# Altium PCB Master_Board_v1_110116.PcbDoc
Units mil, origin at the board's own origin, x right, y up, seen from the top; angles counter-clockwise.
Board outline 2559.06 x 1968.5 mil, 2 copper layers (Top Layer, Bottom Layer); 33 components, 36 nets, 213 pads, 37 vias.
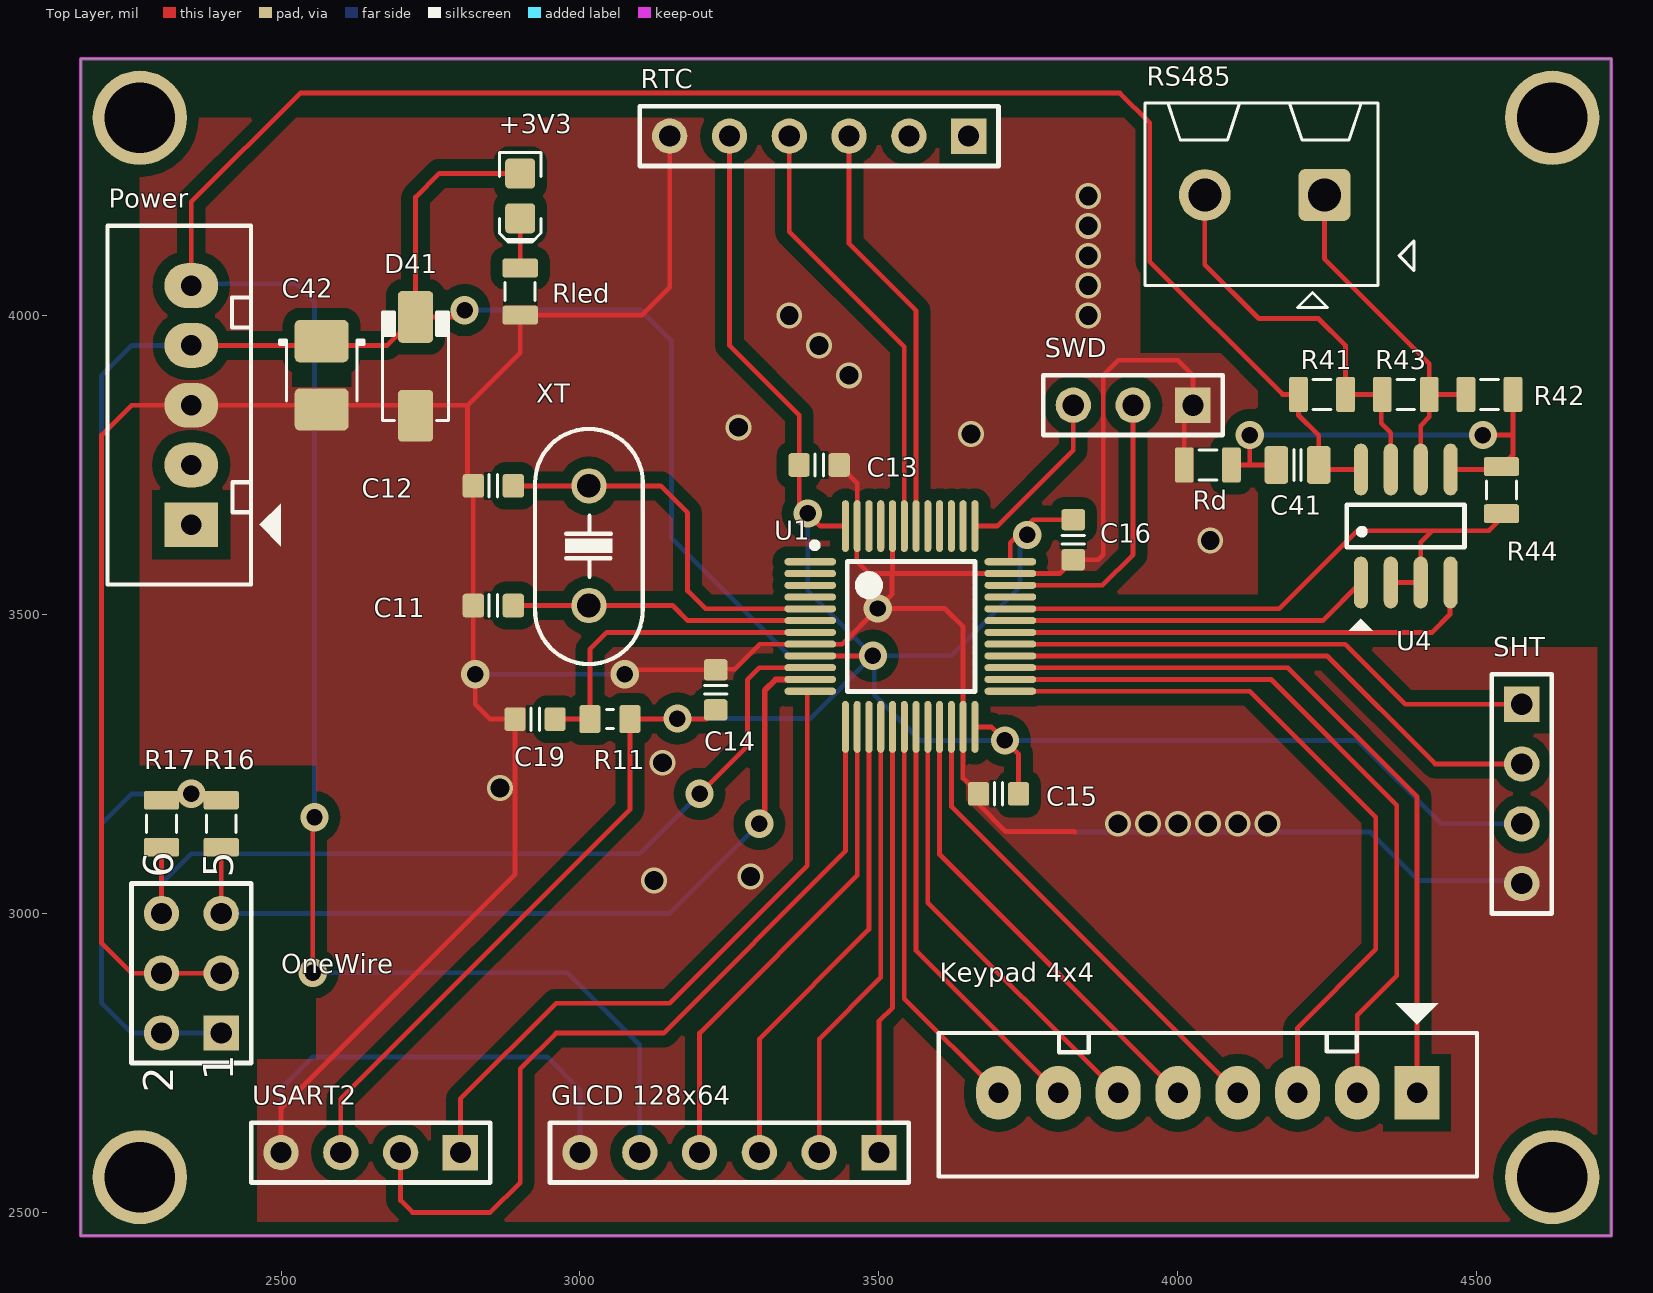
[diagram p0: Top Layer view]
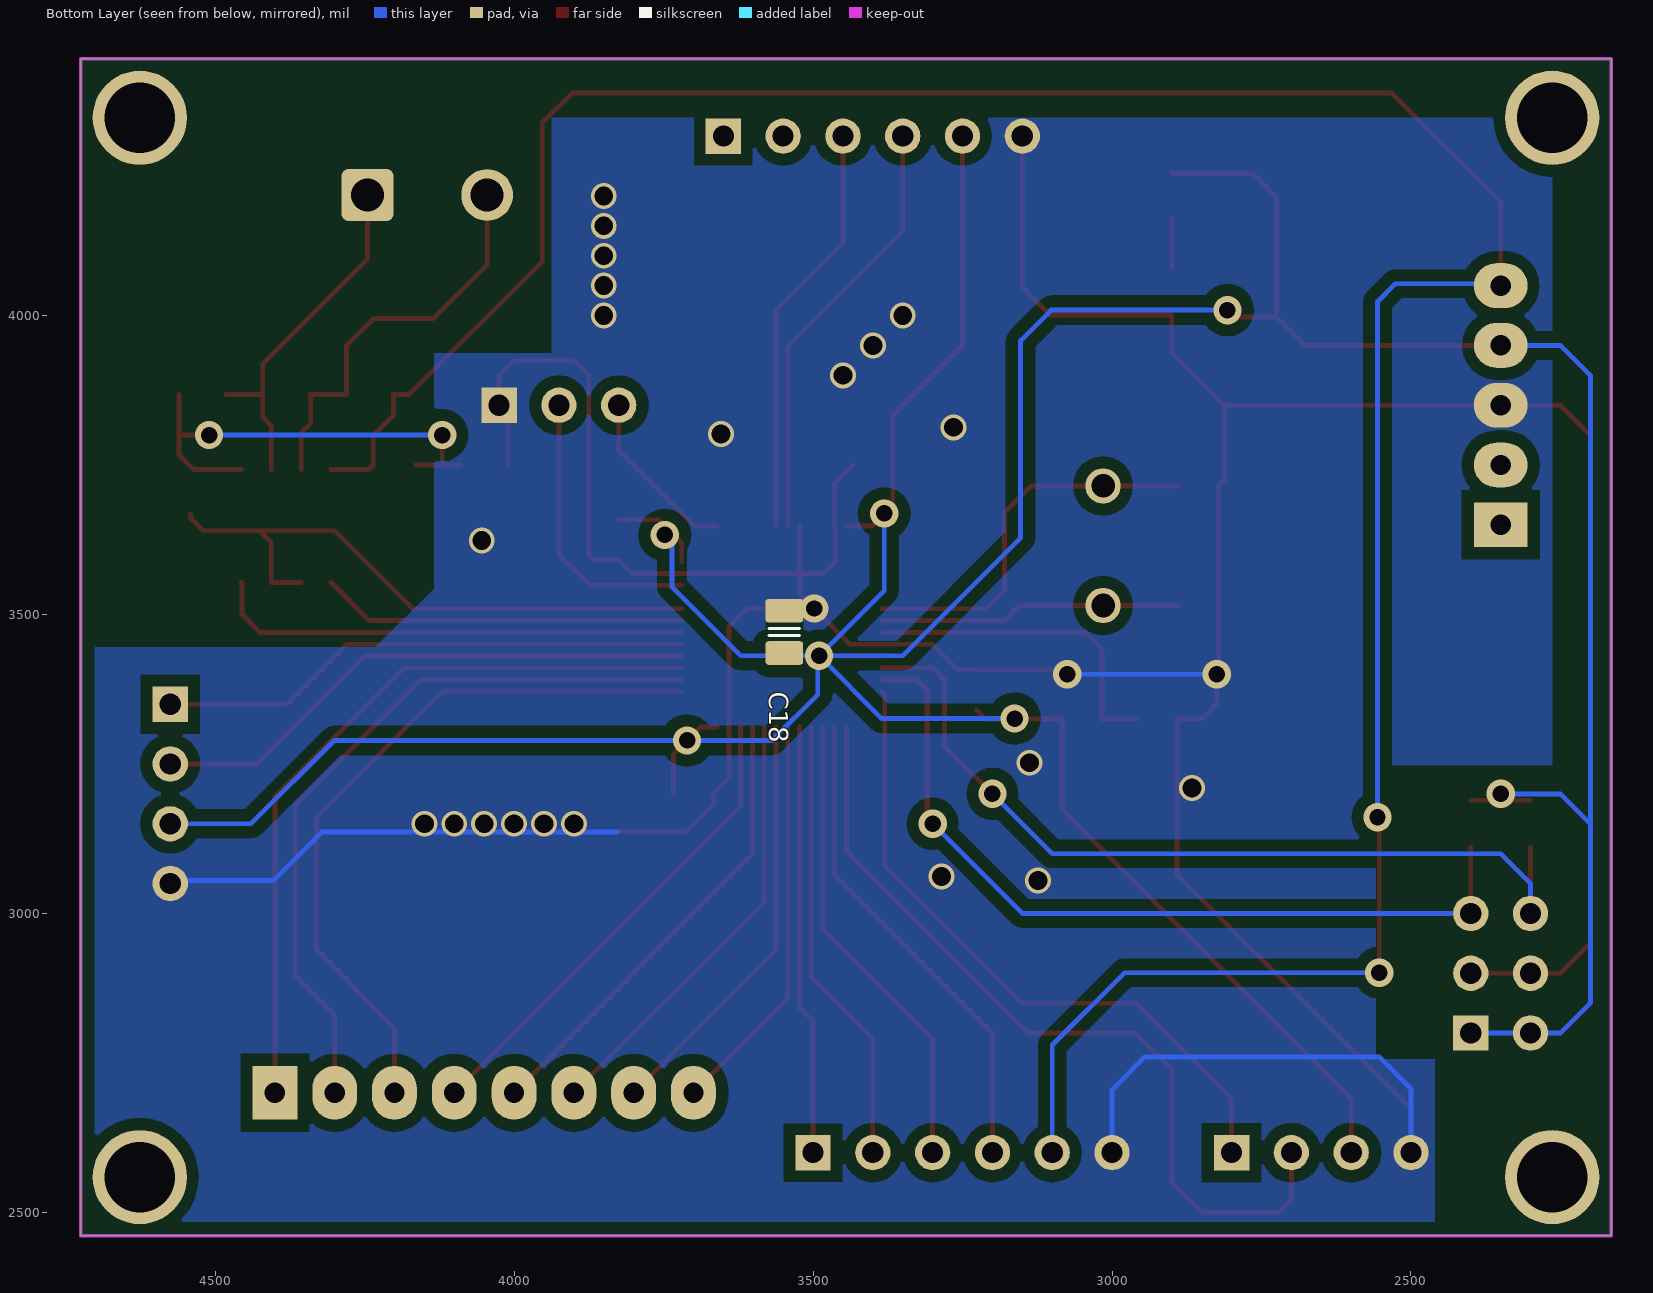
[diagram p1: Bottom Layer view, seen from below]

## Layer stack, top to bottom
Top Solder: solder mask 0.4, Solder Resist, Dk 3.5
Top Layer: signal copper 1.4
Dielectric 1: dielectric 12.6, FR-4, Dk 4.8
Bottom Layer: signal copper 1.4
Bottom Solder: solder mask 0.4, Solder Resist, Dk 3.5

## Board outline
2165.35,2460.63 4724.41,2460.63 4724.41,4429.13 2165.35,4429.13

## Design rules (kind name [scope] priority, off if disabled: settings)
Clearance [All] p1: gap=20
PlaneConnect [All] p1: planeconnectstyle=Direct reliefexpansion=20 reliefentries=4 reliefconductorwidth=10 reliefairgap=10
PolygonConnect [All] p1: connectstyle=Direct reliefconductorwidth=10 reliefentries=4 polygonreliefangle="90 Angle" airgapwidth=10
RoutingVias [All] p1: holewidth=28 width=50 viastyle="Through Hole" minholewidth=23.62 minwidth=43.31 maxholewidth=196.85 maxwidth=196.85
SolderMaskExpansion [All] p1: expansion=4
Width [All] p1: maxlimit=196.85 minlimit=8 preferedwidth=10
29 further rules are at their usual default settings.

## Components (designator, comment, footprint, x,y, rotation, side; value= is the part's Value field where it differs from the comment)
+3V3 "Blue" LED-0805-K 2900,4200 r270 top
C11 "Cap_22p_0603" CAPC1608N 2855,3515 r180 top
C12 "Cap_22p_0603" CAPC1608N 2855,3715 r180 top
C13 "Cap_104_0603" CAPC1608N 3400,3750 r180 top
C14 "Cap_104_0603" CAPC1608N 3227,3374 r270 top
C15 "Cap_104_0603" CAPC1608N 3700,3200 r0 top
C16 "Cap_104_0603" CAPC1608N 3825,3625 r90 top
C18 "Cap_10uF_0805" CAPC2012N_F#1 3548,3471 r270 bottom
C19 "Cap_104_0603" CAPC1608N 2925,3325 r0 top
C41 "100nF/104" CAPC2012N_F#2 4200,3750 r0 top
C42 "330uF/25V" CAPMP3528X210N 2568,3900 r270 top
D41 "Diode" DO-214AC 2725,3915 r90 top
"GLCD 128x64" "Header 6" HDR1X6 3500,2600 r180 top
"Keypad 4x4" "JP8" CON8 4400,2700 r180 top
OneWire "Header 3X2" HDR2X3 2400,2800 r90 top
Power "JP5" CON5 2350,3650 r90 top
R11 "Res_10k_0603" RESC1608N_F 3050,3325 r0 top
R16 "Res" RESC2012N_F 2400,3150 r90 top
R17 "Res" RESC2012N_F 2300,3150 r90 top
R41 "1k" RESC2012N_F 4241,3868 r180 top
R42 "1k" RESC2012N_F 4521,3868 r180 top
R43 "330R" RESC2012N_F 4381,3868 r180 top
R44 "330R" RESC2012N_F 4541,3708 r270 top
Rd "Res" RESC2012N_F 4050,3750 r180 top
Rled "Res_0805_1k" RESC2012N_F 2900,4040 r270 top
RS485 "Stackable ScrewTerm" 2P_PCB1 4300,4050 r90 top
RTC "Header 6" HDR1X6 3650,4300 r180 top
SHT "Header 4" HDR1X4 4575,3350 r270 top
SWD "Header 3" HDR1X3 4025,3850 r180 top
U1 "STM32F103C8T6" LQFT48N 3325,3250 r0 top
U4 "MAX485" SO-8 4381,3648 r90 top
USART2 "Header 4" HDR1X4 2800,2600 r180 top
XT "8MHz" XT2 3015,3615 r90 top

## Footprints (in the part's own frame and the unit in brackets; to place one, negate y for a bottom-side part, rotate by r counter-clockwise, add the part's x,y. Pads: shape width x height; smd on the part's side, far side on the other; paste and mask are expansions set on the pad)
2P_PCB1 [mm]
  rrect25% 2.2x2.2 hole 1.4: 1(3.85,1.397)
  round 2.2 hole 1.4: 2(3.85,6.477)
  silkscreen extent -0.93,-2.41 7.75,9.02, body extent 0.14,-1.54 7.74,9.06, height 10.01
CAPC1608N [mm] "Chip Capacitor, Body 1.6x0.8mm, 0603, IPC Medium Density"
  round 0.254 on Mech14: 0(0,0)
  rrect25% 0.9x1 smd: 1(-0.85,0) 2(0.85,0)
  Top Layer pour cut-out: -0.4,0.6 0.4,0.6 0.4,-0.6 -0.4,-0.6
  silkscreen extent -0.18,-0.48 0.18,0.48, body extent -0.85,-0.45 0.85,0.45, height 0.89
CAPC2012N_F#1 [mm] "Chip Capacitor, Body 2.0x1.2mm, 0805, IPC Medium Density, for Flex circuits"
  round 0.254 on Mech14: 0(0,0)
  rrect25% 1.2x1.4 on Bottom Solder: 1(-0.9,0) 1(0.9,0)
  rrect25% 1x1.6 smd paste-1: 1(-0.9,0) 2(0.9,0)
  rrect25% 1x1.4 on Bottom Paste: 1(-0.9,0) 1(0.9,0)
  Top Layer pour cut-out: -0.4,0.8 0.4,0.8 0.4,-0.8 -0.4,-0.8
  silkscreen extent -0.15,-0.65 0.15,0.65, body extent -1.1,-0.72 1.1,0.73, height 1.34
CAPC2012N_F#2 [mm] "Chip Capacitor, Body 2.0x1.2mm, 0805, IPC Medium Density, for Flex circuits"
  round 0.254 on Mech14: 0(0,0)
  rrect25% 1.2x1.4 on Top Solder: 1(-0.9,0) 1(0.9,0)
  rrect25% 1x1.6 smd paste-1: 1(-0.9,0) 2(0.9,0)
  rrect25% 1x1.4 on Top Paste: 1(-0.9,0) 1(0.9,0)
  Top Layer pour cut-out: -0.4,0.8 0.4,0.8 0.4,-0.8 -0.4,-0.8
  silkscreen extent -0.15,-0.65 0.15,0.65, body extent -1.1,-0.72 1.1,0.73, height 1.34
CAPMP3528X210N [mm] "Molded body capacitor, Body 3.5x2.8mm, 1210, IPC Nominal settings"
  round 0.254 on Mech14: 0(0,0)
  rrect25% 1.8x2.3 smd: 1(-1.45,0) 2(1.45,0)
  Top Layer pour cut-out: -0.508,1.27 0.508,1.27 0.508,-1.27 -0.508,-1.27
  silkscreen extent -1.5,-1.8 1.1,1.8, body extent -1.75,-1.4 1.75,1.4, height 2.1
CON5 [mil] "CON5"
  rect 75x90 hole 34: 1(0,0)
  oval 75x90 hole 34: 2(100,0) 3(200,0) 4(300,0) 5(400,0)
  silkscreen extent -100,-150 500,140
CON8 [mil] "CON8"
  rect 75x90 hole 34: 1(0,0)
  oval 75x90 hole 34: 2(100,0) 3(200,0) 4(300,0) 5(400,0) 6(500,0) 7(600,0) 8(700,0)
  silkscreen extent -100,-150 800,140
DO-214AC [mm] "JEDEC DO214 variation AC. SMA"
  round 0.508 on Mech14: 0(0,0)
  rrect25% 2.2x1.5 smd: A(-2.1,0) K(2.1,0)
  silkscreen extent -2.3,-1.4 2.3,1.4, body extent -2.6,-1.3 2.6,1.3, height 2.42
HDR1X3 [mm] "Connector; Header; 3 Position"
  rect 1.5x1.5 hole 0.9: 1(0,0)
  round 1.5 hole 0.9: 2(2.54,0) 3(5.08,0)
  silkscreen extent -1.27,-1.27 6.35,1.27, body extent -1.27,-1.27 6.35,1.27, height 7
HDR1X4 [mm] "Connector; Header; 4 Position"
  rect 1.5x1.5 hole 0.9: 1(0,0)
  round 1.5 hole 0.9: 2(2.54,0) 3(5.08,0) 4(7.62,0)
  silkscreen extent -1.27,-1.27 8.89,1.27, body extent -1.27,-1.27 8.89,1.27, height 7
HDR1X6 [mm] "Connector; Header; 6 Position"
  rect 1.5x1.5 hole 0.9: 1(0,0)
  round 1.5 hole 0.9: 2(2.54,0) 3(5.08,0) 4(7.62,0) 5(10.16,0) 6(12.7,0)
  silkscreen extent -1.27,-1.27 13.97,1.27, body extent -1.27,-1.3 13.97,1.24, height 8.55
HDR2X3 [mm] "Connector; Header; 3x2 Position"
  rect 1.5x1.5 hole 0.9: 1(0,0)
  round 1.5 hole 0.9: 2(0,2.54) 3(2.54,0) 4(2.54,2.54) 5(5.08,0) 6(5.08,2.54)
  silkscreen extent -1.27,-1.27 6.35,3.81, body extent -1.27,-1.27 6.35,3.81, height 7
LED-0805-K [mil]
  round 20 on Mech14: 0(0,0)
  rrect25% 50x50 smd: A(-37.5,0) K(37.5,0)
  Top Layer pour cut-out: -15,30 15,30 15,-30 -15,-30
  silkscreen extent -72,-35 77,35, body extent -39,-25 39,25, height 31
LQFT48N [mm] "Thin QFP, 48-Leads, Body 7x7mm, Pitch 0.5mm"
  oval 2.2x0.3 smd: 1(1.525,8.59) 2(1.525,8.09) 3(1.525,7.59) 4(1.525,7.09) 5(1.525,6.59) 6(1.525,6.09) 7(1.525,5.59) 8(1.525,5.09) 9(1.525,4.59) 10(1.525,4.09) 11(1.525,3.59) 12(1.525,3.09) 25(10.025,3.09) 26(10.025,3.59) 27(10.025,4.09) 28(10.025,4.59) 29(10.025,5.09) 30(10.025,5.59) 31(10.025,6.09) 32(10.025,6.59) 33(10.025,7.09) 34(10.025,7.59) 35(10.025,8.09) 36(10.025,8.59)
  oval 0.3x2.2 smd: 13(3.021,1.575) 14(3.521,1.575) 15(4.021,1.575) 16(4.521,1.575) 17(5.021,1.575) 18(5.521,1.575) 19(6.021,1.575) 20(6.521,1.575) 21(7.021,1.575) 22(7.521,1.575) 23(8.021,1.575) 24(8.521,1.575) 37(8.521,10.105) 38(8.021,10.105) 39(7.521,10.105) 40(7.021,10.105) 41(6.521,10.105) 42(6.021,10.105) 43(5.521,10.105) 44(5.021,10.105) 45(4.521,10.105) 46(4.021,10.105) 47(3.521,10.105) 48(3.021,10.105)
  silkscreen extent 1.6,3.08 8.52,9.41, body extent 1.27,1.35 10.27,10.35, height 1.5
RESC1608N_F [mm] "Chip Resistor, Body 1.6x0.8mm, 0603, IPC Medium Density, for Flex circuits"
  round 0.254 on Mech14: 0(0,0)
  rrect25% 1.1x1 on Top Solder: 1(-0.85,0) 1(0.85,0)
  rrect25% 0.9x1.2 smd paste-1: 1(-0.85,0) 2(0.85,0)
  rrect25% 0.9x1 on Top Paste: 1(-0.85,0) 1(0.85,0)
  Top Layer pour cut-out: -0.4,0.6 0.4,0.6 0.4,-0.6 -0.4,-0.6
  silkscreen extent -0.15,-0.41 0.15,0.41, body extent -0.87,-0.47 0.88,0.48, height 0.54
RESC2012N_F [mm] "Chip Resistor, Body 2.0x1.2mm, 0805, IPC Medium Density"
  round 0.254 on Mech14: 0(0,0)
  rrect25% 1x1.3 on Top Solder: 1(-1,0) 1(1,0)
  rrect25% 0.8x1.5 smd paste-1: 1(-1,0) 2(1,0)
  rrect25% 0.8x1.3 on Top Paste: 1(-1,0) 1(1,0)
  Top Layer pour cut-out: -0.6,0.75 0.6,0.75 0.6,-0.75 -0.6,-0.75
  silkscreen extent -0.38,-0.64 0.38,0.64, body extent -1.1,-0.67 1.1,0.68, height 0.69
SO-8 [mm] "8-Pin Small Outline Integrated Circuit 1.27 mm Pitch, IPC Medium Density"
  oval 2.2x0.6 smd: 1(-2.4,1.905) 2(-2.4,0.635) 3(-2.4,-0.635) 4(-2.4,-1.905) 5(2.4,-1.905) 6(2.4,-0.635) 7(2.4,0.635) 8(2.4,1.905)
  silkscreen extent -4.44,-2.5 0.9,2.5, body extent -1.95,-2.45 1.95,2.45, height 1.75
XT2 [mm]
  round 1.5 hole 1: 1(-2.54,0) 2(2.54,0)
  silkscreen extent -5.03,-2.29 4.96,2.29, body extent -5.93,-2.36 5.42,2.29, height 3.5

## Part data
+3V3: library part LED_SMD_Blue_0805_100mcd, "LED 0805 SMD Blue 100mcd 470nm"
C11 C12 C13 C14 C15 C16 C18 C19 C41: library part "CAP NP"
C42: library part CP4, "Cap 1000uF/16V - 220uF/50V"
"GLCD 128x64" RTC: "Header, 6-Pin"
"Keypad 4x4": library part Con8, "Connector 8"
OneWire: "Header, 3-Pin, Dual row"
Power: library part Con5, "Connector 5"
R11 Rled: library part Res
R41 R42 R43 R44: library part Res, "Tro dan"
RS485: library part 2P_ScrewTerm_90S_3.81MM, "Terminal Block Screw Type THT 2-Position 3.81mm pitch"
SHT USART2: "Header, 4-Pin"
SWD: "Header, 3-Pin"
U1: "ARM Cortex-M3 32-bit MCU, 64 KB Flash, 20 KB Internal RAM, 37 I/Os, 48-pin LQFP, -40 to 85 degC, Tray"
U4: "RS232 - RS485 (Same sn75176)"
XT: library part Crystal

## Free pads (board coordinates)
  round 157.48 hole 118.11: 2(4625.98,4330.71) 3(4625.98,2559.06) 4(2263.78,2559.06) 5(2263.78,4330.71)

## Via types
v1: diameter 43.31, hole 31.5, Top Layer to Bottom Layer, 21 vias
v2: diameter 47.24, hole 27.56, Top Layer to Bottom Layer, 16 vias

## Nets (pads, with @x,y where several pads share a name; then routed paths per layer and width w, separated by ;. In a path a pad name is that pad's centre, name@x,y a point inside that pad or via, vN(x,y) a via of type N, cw(c..) or ccw(c..) an arc to the next point about the centre after c; other vN are vias at no path point)
+3V3: +3V3.A C13.2 C14.2 C15.2 C16.2 C18.2 C42.1 D41.K OneWire.1 OneWire.2 Power.4 R11.2 R16.2 R17.2 RTC.5 SHT.3 U1.9 U1.24 U1.36 U1.48 USART2.3 | length 8248.2
  Top Layer w8: R17.2 R16.2 ; Power.4 2677.32,3950 D41.K ; USART2.3 2600,2690 3083.46,3173.46 R11.2 v2@3163,3325 ; v2(2807,4009) 2795.68,3997.68 D41.K ; +3V3.A 2765.5,4237.5 2765,4238 2725,4198 D41.K ; v2(3163,3326) v2@3163,3325 ; C14.2 3211.46,3325 v2@3163,3325 ; RTC.5 3250,3950 3366.54,3833.46 C13.2 3366.54,3683.46 v2(3381,3669) 3402.17,3647.83 U1.48 ; U1.9 3489.71,3430.71 v2(3490,3431) ; U1.24 3687.99,3312.01 v2(3710.73,3289.27) 3733.46,3266.54 C15.2 ; U1.36 3719.68,3619.68 3758.46,3658.46 C16.2
  Bottom Layer w8: v2(2350,3200) 2250,3200 2200,3150 ; Power.4 2250,3950 2200,3900 2200,3150 ; OneWire.1 OneWire.2 2250,2800 2200,2850 2200,3150 ; v2(2807,4009) 3102,4009 3153,3958 3153,3628 3350,3431 v2(3490,3431) ; v2(3163,3326) 3385,3326 v2(3490,3431) ; v2(3381,3669) 3381,3540 v2(3490,3431) ; v2(3748,3633) 3745,3633 3736,3642 3736,3546 3621,3431 v2(3490,3431) ; SHT.3 4440,3150 4300.73,3289.27 v2(3710.73,3289.27) 3568.73,3289.27 3492,3366 3492,3429 v2(3490,3431)
+5V: "GLCD 128x64.5" C41.2 Power.5 R41.2 U4.8 | length 4737.4
  Top Layer w8: Power.5 2350,4190 2532,4372 3903,4372 3953,4322 3953,4090 4175,3868 R41.2 4201.63,3833.37 4235.43,3799.57 C41.2 4242.94,3742.49 U4.8 ; v2(2553,2901) 2553,3158 v2(2556,3161)
  Bottom Layer w8: Power.5 2353,4053 2526,4053 2556,4023 v2(2556,3161) ; v2(2553,2901) 2979,2901 3100,2780 3100,2600
COLUM1: "Keypad 4x4.5" U1.21 | length 777.1
  Top Layer w8: U1.21 3601.42,3098.58 4000,2700
COLUM2: "Keypad 4x4.6" U1.20 | length 743.8
  Top Layer w8: U1.20 3581.73,3018.27 3900,2700
COLUM3: "Keypad 4x4.7" U1.19 | length 710.6
  Top Layer w8: U1.19 3562.05,2937.95 3800,2700
COLUM4: "Keypad 4x4.8" U1.18 | length 677.3
  Top Layer w8: U1.18 3542.36,2857.64 3700,2700
DGND: C41.1@4164.57,3750 R42.1@4560.37,3868 R44.1@4541,3747.37 Rd.1@4089.37,3750 U4.5 | length 781.2
  Top Layer w8: Rd.1@4089.37,3750 4120,3750 ; v2(4120,3800) 4120,3750 ; C41.1@4164.57,3750 4120,3750 ; U4.5 4536.12,3742.49 4541,3747.37 4560.37,3766.74 4560.37,3800 ; v2(4510,3800) 4560.37,3800 ; R42.1@4560.37,3868 4560.37,3800
  Bottom Layer w8: v2(4120,3800) v2(4510,3800)
GLCD_BL: "GLCD 128x64.1" U1.17 | length 721.4
  Top Layer w8: 3500,2600 3500,2820 3522.68,2842.68 U1.17
GLCD_EN: "GLCD 128x64.2" U1.16 | length 754.7
  Top Layer w8: 3400,2600 3400,2790 3502.99,2892.99 U1.16
GLCD_RS: "GLCD 128x64.4" U1.14 | length 821.2
  Top Layer w8: 3200,2600 3200,2800 3463.62,3063.62 U1.14
GLCD_RW: "GLCD 128x64.3" U1.15 | length 787.9
  Top Layer w8: 3300,2600 3300,2790 3483.31,2973.31 U1.15
GND: "GLCD 128x64.6" C11.2 C12.2 C13.1 C14.1 C15.1 C16.1 C18.1@3548,3506.43 C19.1 C42.2 D41.A OneWire.3 OneWire.4 Power.3 Rd.2 Rled.2 RTC.6 SHT.4 SWD.1 U1.8 U1.23 U1.35 U1.44 U1.47 USART2.4 | length 8165.3
  Top Layer w8: OneWire.3 OneWire.4 2250,2900 2200,2950 2200,3800 2250,3850 Power.3 2812,3850 ; USART2.4 2500,2674 2891.54,3065.54 C19.1 2850,3325 2825,3350 v2(2825,3400) 2821.54,3403.46 C11.2 C12.2 2812,3724.54 2812,3850 ; v2(3075,3400) 3082.46,3407.46 C14.1 ; RTC.6 3150,4047 3103.63,4000.63 Rled.2 2900,3938 2812,3850 ; C14.1@3227,3408.46 3258.46,3408.46 3300.39,3450.39 U1.8 3438.39,3450.39 v2(3498,3510) ; C13.1 3463.62,3719.84 U1.47 3463,3647.21 3463,3589 3483.5,3568.5 3522,3568.5 ; U1.44 3522.68,3569.18 3522,3568.5 ; 3827,3136 3826,3137 3712,3137 3666.54,3182.46 C15.1 3640.79,3225.75 U1.23 3640.79,3479.21 3610,3510 v2(3498,3510) ; Rd.2 4010.63,3835.63 SWD.1 4025,3900 4000,3925 3900,3925 3875,3900 3875,3600 3866.54,3591.54 C16.1 3801.97,3568.5 U1.35 3522,3568.5 ; v2(3498,3510) 3522,3534 3522,3568.5
  Bottom Layer w8: USART2.4 2500,2707 2553,2760 2945,2760 3000,2705 3000,2600 ; v2(2825,3400) v2(3075,3400) ; 3827,3136 4322,3136 4403,3055 4570,3055 SHT.4
  other v1: 3124,3055 3285,3062 3900,3150 3950,3150 4000,3150 4050,3150 4100,3150 4150,3150 2866,3210 3138,3252 4054,3624 3654,3802 3265,3813 3450,3900 3400,3950 3350,4000 3850,4000 3850,4050 3850,4100 3850,4150 3850,4200
I2C1_SCL: RTC.3 U1.42 | length 698.6
  Top Layer w8: RTC.3 3450,4120 3562.05,4007.95 U1.42
I2C1_SDA: RTC.4 U1.43 | length 731.8
  Top Layer w8: RTC.4 3350,4140 3542.36,3947.64 U1.43
Net+3V3_K: +3V3.K Rled.1@2900,4079.37 | length 83.1
  Top Layer w8: Rled.1@2900,4079.37 +3V3.K
NRST: C19.2 R11.1@3016.54,3325 U1.7 | length 554.9
  Top Layer w8: C19.2 3016.54,3325 3016.54,3441.54 3045.08,3470.08 U1.7
PA1: OneWire.5 R16.1@2400,3110.63 U1.11 | length 1383.1
  Top Layer w8: OneWire.5 R16.1@2400,3110.63
  Top Layer w10: v2(3300,3150) 3309,3159 3309,3373 3327.34,3391.34 U1.11
  Bottom Layer w8: OneWire.5 3150,3000 v2(3300,3150)
PA11: R44.2 U1.32 U4.2 U4.3 | length 1036.1
  Top Layer w8: U1.32 4169.45,3509.45 4300,3640 4425,3640 ; U4.2 U4.3 4406,3621 4425,3640 ; R44.2 4541,3661 4520,3640 4425,3640
PA15: U1.38
RCC_OSC_IN: C12.1 U1.5 XT.2 | length 658.2
  Top Layer w8: C12.1 XT.2 3135,3715 3180,3670 3180,3539.45 3210,3509.45 U1.5
RCC_OSC_OUT: C11.1 U1.6 XT.1 | length 507
  Top Layer w8: C11.1 XT.1 3154.76,3515 3180,3489.76 U1.6
ROW1: "Keypad 4x4.1" U1.27 | length 1264.8
  Top Layer w8: U1.27 4183.98,3411.02 4400,3195 4400,2700
ROW2: "Keypad 4x4.2" U1.26 | length 1241.8
  Top Layer w8: U1.26 4155.66,3391.34 4366,3181 4366,2896 4300,2830 4300,2700
ROW3: "Keypad 4x4.3" U1.25 | length 1213.8
  Top Layer w8: U1.25 4120.35,3371.65 4331,3161 4331,2940 4200,2809 4200,2700
ROW4: "Keypad 4x4.4" U1.22 | length 810.4
  Top Layer w8: U1.22 3621.1,3178.9 4100,2700
RS485A: R42.2 R43.1@4420.37,3868 RS485.1 U4.6 | length 598.9
  Top Layer w8: RS485.1 4245,4095 4420.37,3919.63 R43.1@4420.37,3868 ; U4.6 4406,3816 4420.37,3830.37 R43.1@4420.37,3868 ; R42.2 R43.1@4420.37,3868
RS485B: R41.1@4280.37,3868 R43.2 RS485.2 U4.7 | length 682.8
  Top Layer w8: RS485.2 4045,4085 4135,3995 4235,3995 4280.37,3949.63 4280.37,3868 4338.37,3868 R43.2@4340,3866.37 ; R43.2 R43.2@4340,3866.37 ; U4.7 4356,3804 4340,3820 R43.2@4340,3866.37
SHT_SCL: SHT.2 U1.28 | length 930.2
  Top Layer w8: U1.28 4249.29,3430.71 4430,3250 SHT.2
SHT_SDA: SHT.1 U1.29 | length 896.9
  Top Layer w8: U1.29 4279.61,3450.39 4380,3350 SHT.1
SWCLK: SWD.3 U1.37 | length 292.2
  Top Layer w8: U1.37 3697.83,3647.83 3825,3775 SWD.3
SWDIO: SWD.2 U1.34 | length 476.5
  Top Layer w8: U1.34 3873.82,3548.82 3925,3600 SWD.2
USART1_RX: U1.31 U4.1 | length 612.7
  Top Layer w8: U1.31 4242.25,3489.76 U4.1
USART1_TX: U1.30 U4.4 | length 801.6
  Top Layer w8: U1.30 4425.08,3470.08 4455,3500 4455,3552.51 U4.4
USART2_RX: U1.13 USART2.2 | length 1401.8
  Top Layer w8: USART2.2 2700,2520 2720,2500 2850,2500 2900,2550 2900,2740 2960,2800 3140,2800 3443.94,3103.94 U1.13
USART2_TX: U1.12 USART2.1 | length 1125.3
  Top Layer w8: USART2.1 2800,2690 2960,2850 3150,2850 3380,3080 3380,3366.61 U1.12
WKUP_PA0: OneWire.6 R17.1@2300,3110.63 U1.10 | length 1460.2
  Top Layer w8: OneWire.6 R17.1@2300,3110.63 ; v2(3200,3200) 3280,3280 3280,3391 3300.02,3411.02 U1.10
  Bottom Layer w8: OneWire.6 2300,3050 2350,3100 3100,3100 v2(3200,3200)
pads on no net: +3V3.0 C11.0 C12.0 C13.0 C14.0 C15.0 C16.0 C18.0 C18.1@3548,3435.57 C18.1@3548,3506.43 C18.1@3548.01,3435.57 C18.1@3548.01,3506.44 C19.0 C41.0 C41.1@4164.56,3749.99 C41.1@4164.57,3750 C41.1@4235.43,3749.99 C41.1@4235.43,3750 C42.0 D41.0 Power.1 Power.2 R11.0 R11.1@3016.54,3325 R11.1@3016.54,3325.01 R11.1@3083.46,3325 R11.1@3083.47,3325.01 R16.0 R16.1@2400,3110.63 R16.1@2400,3189.37 R16.1@2400.01,3110.63 R16.1@2400.01,3189.37 R17.0 R17.1@2300,3110.63 R17.1@2300,3189.37 R17.1@2300.01,3110.63 R17.1@2300.01,3189.37 R41.0 R41.1@4201.63,3868 R41.1@4201.63,3868.01 R41.1@4280.37,3868 R41.1@4280.37,3868.01 R42.0 R42.1@4481.63,3868 R42.1@4481.63,3868.01 R42.1@4560.37,3868 R42.1@4560.37,3868.01 R43.0 R43.1@4341.63,3868 R43.1@4341.63,3868.01 R43.1@4420.37,3868 R43.1@4420.37,3868.01 R44.0 R44.1@4540.99,3668.63 R44.1@4540.99,3747.37 R44.1@4541,3668.63 R44.1@4541,3747.37 Rd.0 Rd.1@4010.63,3750 Rd.1@4010.63,3750.01 Rd.1@4089.37,3750 Rd.1@4089.37,3750.01 Rled.0 Rled.1@2899.99,4000.63 Rled.1@2899.99,4079.37 Rled.1@2900,4000.63 Rled.1@2900,4079.37 RTC.1 RTC.2 U1.1 U1.2 U1.3 U1.4 U1.33 U1.39 U1.40 U1.41 U1.45 U1.46

## Polygon pours and split planes (outlines as drawn)
GND on Top Layer "GND_L01_P004" (solid, remove dead copper, pour order 4): 4724.41,3444.88 4133.86,3444.88 4133.86,3937.01 3937.01,3937.01 3937.01,4330.71 2263.78,4330.71 2263.78,3248.03 2559.06,3248.03 2559.06,2755.91 2460.63,2755.91 2460.63,2460.63 4724.41,2460.63
GND on Bottom Layer "GND_L02_P006" (solid, remove dead copper, pour order 6): 2263.78,4330.71 3937.01,4330.71 3937.01,3937.01 4133.86,3937.01 4133.86,3543.31 4232.28,3444.88 4724.41,3444.88 4724.41,2460.63 2460.63,2460.63 2460.63,2755.91 2559.06,2755.91 2559.06,3248.03 2263.78,3248.03

## Keep-outs
Keep-Out Layer:
  the board outline again, w5.91

## Text inside footprints (layer, text, board x,y; h text height)
OneWire: Top Overlay "1" at 2420,2720 h50 r90; Top Overlay "2" at 2320,2700 h50 r90; Top Overlay "5" at 2420,3060 h50 r90; Top Overlay "6" at 2320,3060 h50 r90